# Altium PCB Control_Board_Model_C_Rigid_Flex.PcbDoc (part 7 of 8)
Units mm, origin at the board's own origin, x right, y up, seen from the top; angles counter-clockwise.
Board outline 86.8 x 53.6 mm, 6 copper layers (1-GND, 2-Sig, 3-Pwr, 4-GND, 5-Sig, 6-GND), stack 0.998 mm thick; 418 components, 342 nets, 1601 pads, 45 vias.
Unrouted connection lines stored in the file: 25.
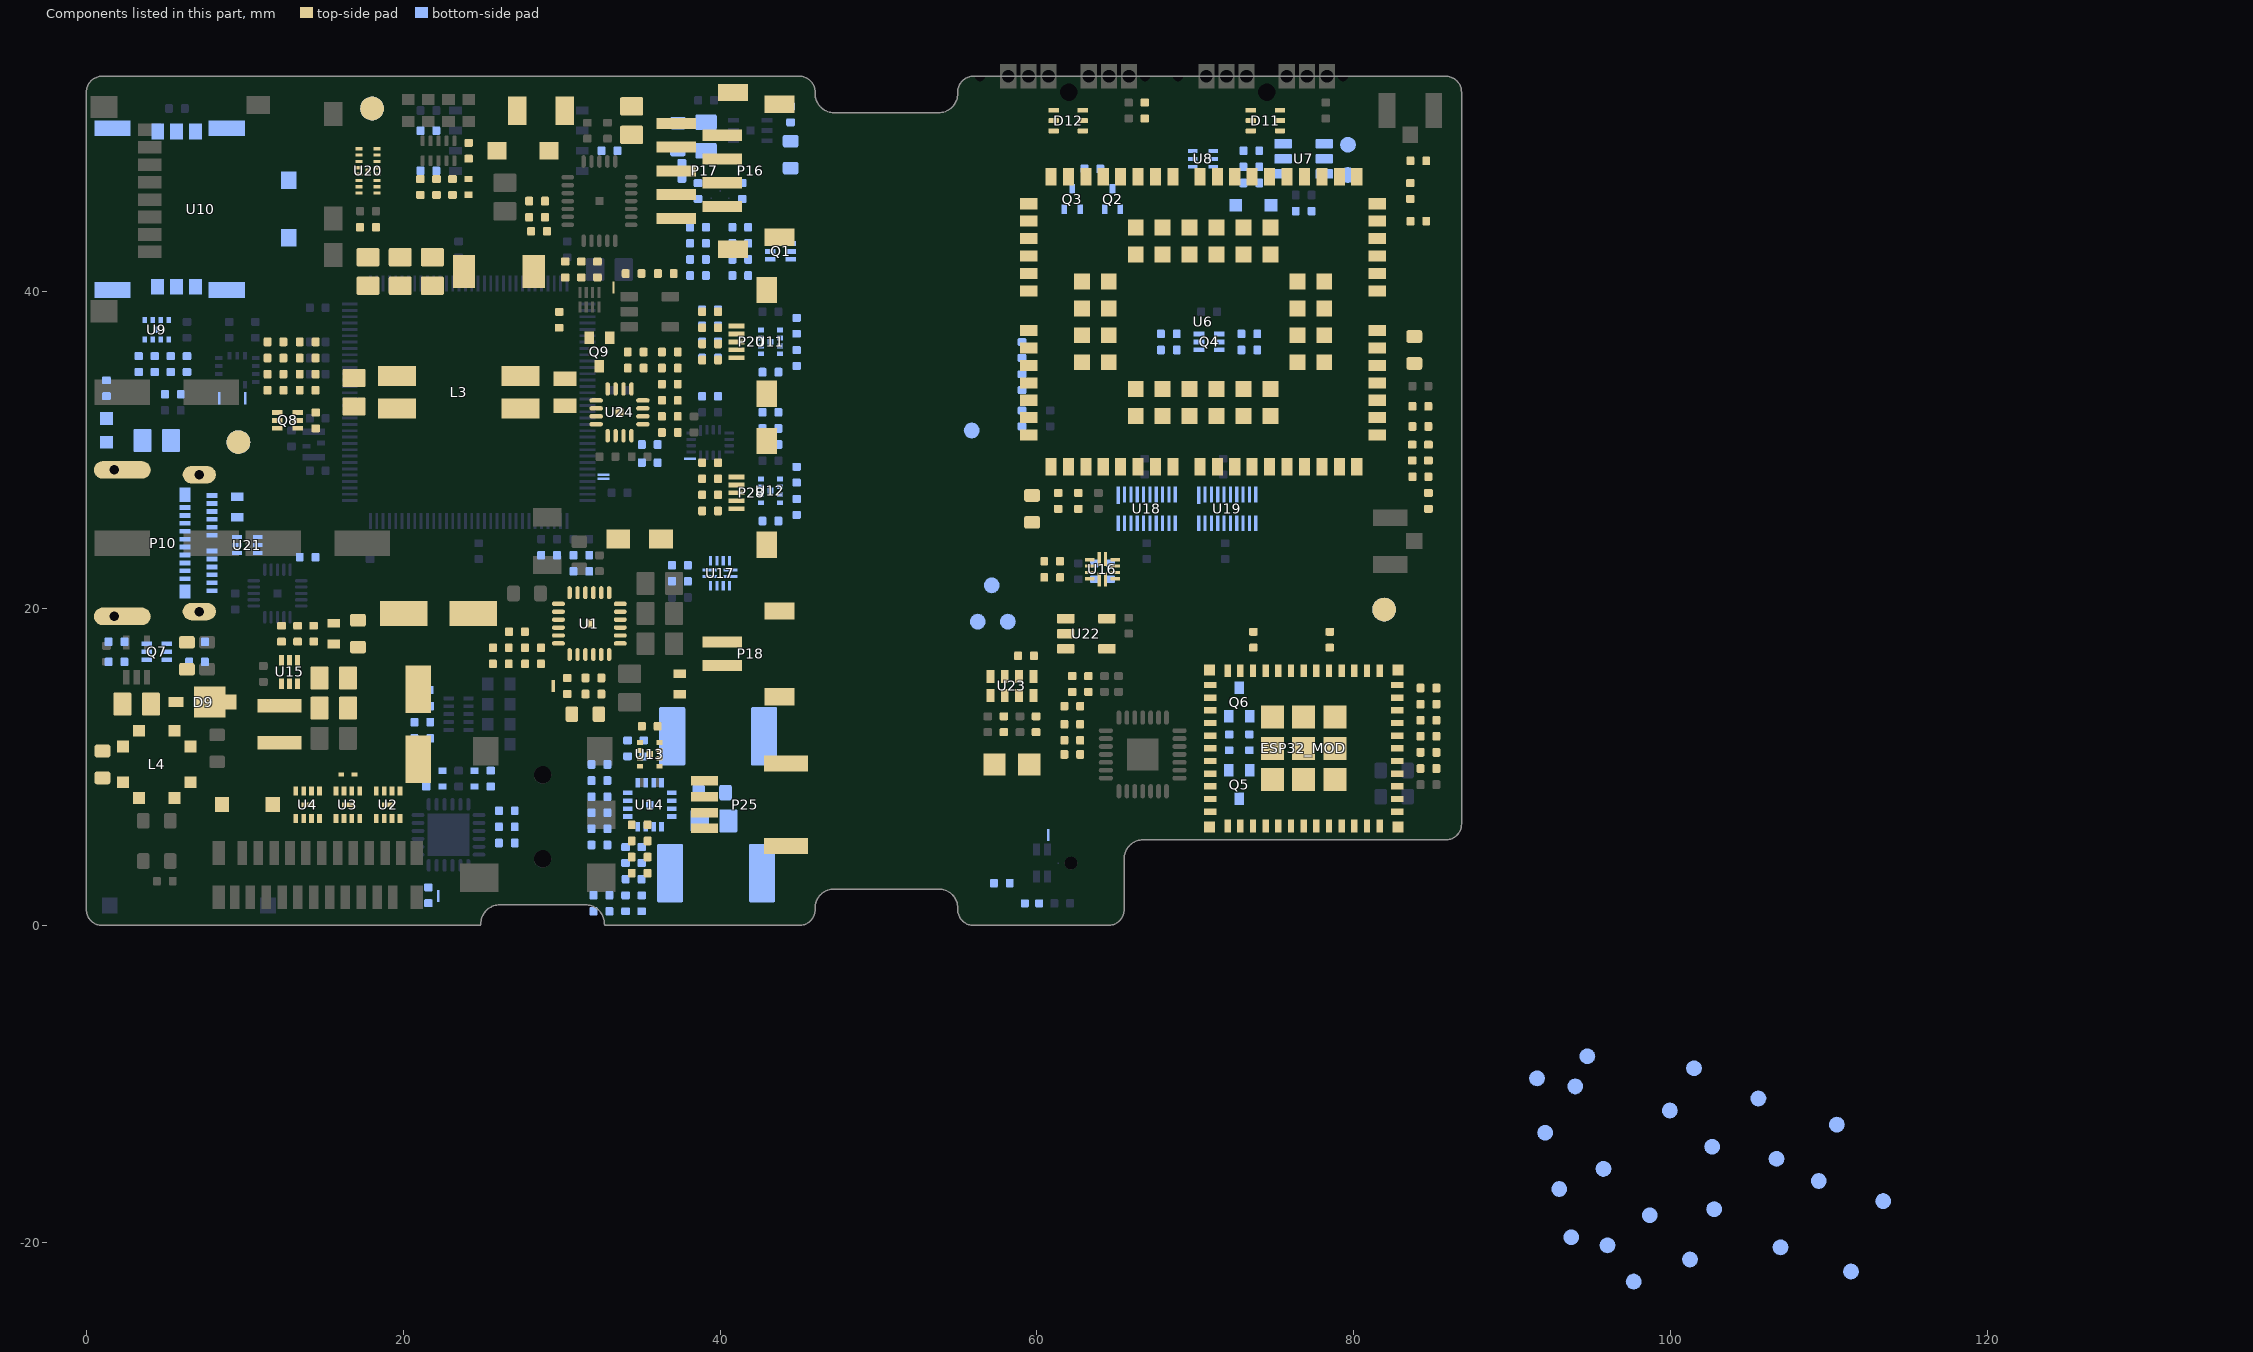
[diagram p7: the components of this part, seen from the top]

## Part data (continued)
U7: library part "TVS DIODE 5.25V 17V SOT23-6", "17V Clamp 5A (8/20µs) Ipp Tvs Diode Surface Mount SOT-23-6", Breakdown Voltage=6V, Capacitance=3.5pF, Case/Package=SOT-23, Clamping Voltage=17V, Leakage Current=150nA, Manufacturer=STMicroelectronics, Max Operating Temperature=125°C, Min Operating Temperature=-40°C, Operating Supply Voltage=1.1V, Package Quantity=3000, Peak Pulse Current=5A, Power Line Protection=Yes, Reverse Standoff Voltage=5.25V, Supplier Part Number 1=497-5235-1-ND, Test Current=1mA, Working Voltage=5V, ComponentLink1Description=http://www.farnell.com/datasheets/1738051.pdf?src-supplier=Element14, ComponentLink1URL=http://www.farnell.com/datasheets/1738051.pdf?src-supplier=Element14, ComponentLink2Description=http://www.st.com/content/ccc/resource/technical/document/datasheet/06/1d/48/9c/6c/20/4a/b2/CD00050750.pdf/files/CD00050750.pdf/jcr:content/translations/en.CD00050750.pdf?src-supplier=Mouser, ComponentLink2URL=http://www.st.com/content/ccc/resource/technical/document/datasheet/06/1d/48/9c/6c/20/4a/b2/CD00050750.pdf/files/CD00050750.pdf/jcr:content/translations/en.CD00050750.pdf?src-supplier=Mouser, ComponentLink3Description=http://www.st.com/web/en/resource/technical/document/datasheet/CD00050750.pdf?src-supplier=Future+Electronics, ComponentLink3URL=http://www.st.com/web/en/resource/technical/document/datasheet/CD00050750.pdf?src-supplier=Future+Electronics, ComponentLink4Description=http://www.st.com/content/ccc/resource/technical/document/datasheet/06/1d/48/9c/6c/20/4a/b2/CD00050750.pdf/files/CD00050750.pdf/jcr:content/translations/en.CD00050750.pdf?src-supplier=Verical, ComponentLink4URL=http://www.st.com/content/ccc/resource/technical/document/datasheet/06/1d/48/9c/6c/20/4a/b2/CD00050750.pdf/files/CD00050750.pdf/jcr:content/translations/en.CD00050750.pdf?src-supplier=Verical, ComponentLink5Description=http://datasheet.iiic.cc/stmicroelectronics/USBLC6-2SC6.pdf?src-supplier=IIIC, ComponentLink5URL=http://datasheet.iiic.cc/stmicroelectronics/USBLC6-2SC6.pdf?src-supplier=IIIC, ComponentLink6Description=http://www.produktinfo.conrad.com/datenblaetter/1100000-1199999/001184109-da-01-en-IC_ESD_PROTECTI_USBLC6_2SC6_SOT_23_6_STM.pdf?src-supplier=Conrad, ComponentLink6URL=http://www.produktinfo.conrad.com/datenblaetter/1100000-1199999/001184109-da-01-en-IC_ESD_PROTECTI_USBLC6_2SC6_SOT_23_6_STM.pdf?src-supplier=Conrad, Contact Plating=Tin,Matte, Data Rate=480Mbps, Depth=1.75mm, Direction=Unidirectional,Bidirectional, Element Configuration=Dual, ESD Protection=Yes, Height=1.3mm, Lead Free="Lead Free", Length=3.05mm, Manufacturer Part Number=USBLC6-2SC6, Max Breakdown Voltage=6V, Max Reverse Leakage Current=150nA, Min Breakdown Voltage=6V, Mount="Surface Mount", Number of Bidirectional Channels=2, Number of Channels=2, Number of Elements=1, Number of Pins=6, Packaging="Tape and Reel", Polarity=Unidirectional,Bidirectional, Pricing 1="1=0.47, 10=0.399, 25=0.3728, 100=0.2769, 250=0.263, 500=0.2162, 1000=0.1757 (USD)", Radiation Hardening=No, REACH SVHC="No SVHC", Reverse Breakdown Voltage=6V, Stock 1=49245, Supplier 1=Digi-Key, Termination=SMD/SMT, Width=1.75mm
U8 U21: library part "CMC 200MA 2LN SMD ESD", "2 Line Common Mode Choke Surface Mount  200mA DCR 2.5Ohm", Case/Package=QFN, Current=200mA, DC Resistance (DCR)=2.5R, Manufacturer=STMicroelectronics, Max Operating Temperature=85°C, Min Operating Temperature=-40°C, Package Quantity=1, Supplier Part Number 1=497-10773-1-ND, ComponentLink1Description=http://www.st.com/web/en/resource/technical/document/datasheet/CD00282307.pdf?src-supplier=Future+Electronics, ComponentLink1URL=http://www.st.com/web/en/resource/technical/document/datasheet/CD00282307.pdf?src-supplier=Future+Electronics, ComponentLink2Description=http://www.st.com/content/ccc/resource/technical/document/datasheet/3a/28/cf/d0/31/63/48/8c/CD00282307.pdf/files/CD00282307.pdf/jcr:content/translations/en.CD00282307.pdf?src-supplier=Digi-Key, ComponentLink2URL=http://www.st.com/content/ccc/resource/technical/document/datasheet/3a/28/cf/d0/31/63/48/8c/CD00282307.pdf/files/CD00282307.pdf/jcr:content/translations/en.CD00282307.pdf?src-supplier=Digi-Key, ComponentLink3Description=http://www.mouser.com/ds/2/389/ecmf02-2amx6-954491.pdf?src-supplier=Mouser, ComponentLink3URL=http://www.mouser.com/ds/2/389/ecmf02-2amx6-954491.pdf?src-supplier=Mouser, ComponentLink4Description=https://www.verical.com/server-webapp/html/getDatasheet?partID=259862&src-supplier=Verical, ComponentLink4URL=https://www.verical.com/server-webapp/html/getDatasheet?partID=259862&src-supplier=Verical, Current Rating=200mA, Depth=1.55mm, Height=0.022inch, Lead Free="Lead Free", Length=1.75mm, Manufacturer Part Number=ECMF02-2AMX6, Max Current Rating=200mA, Mount="Surface Mount", Number of Lines=2, Number of Pins=6, Packaging="Tape and Reel", Pricing 1="1=0.48, 10=0.418, 25=0.3888, 50=0.3288, 100=0.2989, 250=0.281, 500=0.2511, 1000=0.2033 (USD)", Radiation Hardening=No, REACH SVHC="No SVHC", Stock 1=23653, Supplier 1=Digi-Key, Termination=Flat, Width=0.059inch
U9 U11 U12 U13: library part "FILTER RC(PI) ESD SMD  8-UFDFN EP", "RC (Pi) EMI Filter 2nd Order Low Pass 3 Channel R = 47Ohms, 100Ohms, C = 20pF  8-UFDFN Exposed Pad", Capacitance=20pF, Case/Package=SMD/SMT, Clamping Voltage=10V, Frequency=308MHz, Manufacturer="Texas Instruments", Max Operating Temperature=85°C, Min Operating Temperature=-40°C, Operating Supply Voltage=5.5V, Package Quantity=1, Supplier Part Number 1=296-28299-1-ND, ComponentLink1Description=http://www.ti.com/lit/ds/symlink/tpd3f303.pdf?src-supplier=Digi-Key, ComponentLink1URL=http://www.ti.com/lit/ds/symlink/tpd3f303.pdf?src-supplier=Digi-Key, ComponentLink2Description=http://focus.ti.com/lit/ds/symlink/tpd3f303.pdf?src-supplier=Avnet+Europe, ComponentLink2URL=http://focus.ti.com/lit/ds/symlink/tpd3f303.pdf?src-supplier=Avnet+Europe, ComponentLink3Description=https://www.verical.com/server-webapp/html/getDatasheet?partID=302817&src-supplier=Verical, ComponentLink3URL=https://www.verical.com/server-webapp/html/getDatasheet?partID=302817&src-supplier=Verical, ComponentLink4Description=http://www.farnell.com/datasheets/1558442.pdf?src-supplier=Element14, ComponentLink4URL=http://www.farnell.com/datasheets/1558442.pdf?src-supplier=Element14, Contact Plating=Gold, Depth=1.7mm, ESD Protection=Yes, Height=0.026inch, Lead Free="Lead Free", Length=2.2mm, Manufacturer Part Number=TPD3F303DPVR, Mount="Surface Mount", Number of Channels=3, Number of Pins=8, Packaging="Tape and Reel", Pricing 1="1=0.85, 10=0.812, 25=0.7856, 50=0.6414, 100=0.576, 250=0.5236, 500=0.4974, 1000=0.4451 (USD)", Radiation Hardening=No, REACH SVHC="No SVHC", Stock 1=4896, Supplier 1=Digi-Key, Termination=Flat, Width=0.063inch
U10: library part "NANOSIM SOCKET 1.11H P/PULL TYPE", "6 Position Card Connector NANO SIM Surface Mount, Right Angle Gold", Manufacturer=Molex, Supplier Part Number 1=WM23749CT-ND, ComponentLink1Description=https://www.molex.com/pdm_docs/sd/1042240820_sd.pdf?src-supplier=Digi-Key, ComponentLink1URL=https://www.molex.com/pdm_docs/sd/1042240820_sd.pdf?src-supplier=Digi-Key, ComponentLink2Description=http://www.molex.com/pdm_docs/sd/1042240820_sd.pdf?src-supplier=Avnet, ComponentLink2URL=http://www.molex.com/pdm_docs/sd/1042240820_sd.pdf?src-supplier=Avnet, Connector Type=Connector, Contact Plating=Gold, Manufacturer Part Number=1042240820, Mount="Surface Mount", Number of Positions=6, Number of Rows=2, Orientation="Right Angle", Packaging="Tape and Reel", Pitch=2.54mm, Pricing 1="1=1.31, 10=1.152, 25=1.0844, 50=1.039, 100=0.9939, 250=0.9036, 500=0.8132, 1000=0.7228 (USD)", Stock 1=10989, Supplier 1=Digi-Key
U14: library part "IC STSPIN220 MOTOR DRVR BIPOLAR 0-5V 16FPN", "Bipolar Motor Driver Power MOSFET Step/Direction 16-VFQFPN (3x3)", Manufacturer=STMicroelectronics, Max Operating Temperature=150°C, Min Operating Temperature=-40°C, Output Current=1.3A, Supplier Part Number 1=497-16602-1-ND, ComponentLink1Description=http://www.st.com/content/ccc/resource/technical/document/datasheet/group3/42/7e/5c/90/70/ef/47/95/DM00291865/files/DM00291865.pdf/jcr:content/translations/en.DM00291865.pdf?src-supplier=Digi-Key, ComponentLink1URL=http://www.st.com/content/ccc/resource/technical/document/datasheet/group3/42/7e/5c/90/70/ef/47/95/DM00291865/files/DM00291865.pdf/jcr:content/translations/en.DM00291865.pdf?src-supplier=Digi-Key, ComponentLink2Description=http://www.farnell.com/datasheets/2815804.pdf?src-supplier=Newark, ComponentLink2URL=http://www.farnell.com/datasheets/2815804.pdf?src-supplier=Newark, ComponentLink3Description=http://www.farnell.com/datasheets/2815804.pdf?src-supplier=Farnell, ComponentLink3URL=http://www.farnell.com/datasheets/2815804.pdf?src-supplier=Farnell, Logic Function=AND, Manufacturer Part Number=STSPIN220, Mount="Surface Mount", Packaging="Cut Tape", Pricing 1="1=1.62, 10=1.458, 25=1.3752, 100=1.1, 250=0.9625, 500=0.935, 1000=0.7425 (USD)", Stock 1=3586, Supplier 1=Digi-Key
U15: library part "IC TPS61023DRLT REG BOOST ADJ 3A SOT563", "Boost Switching Regulator IC Positive Adjustable 2.2V 1 Output 3A SOT-563, SOT-666", Input Voltage="0.5 V to 5.5 V", Input Voltage MAX="5.5 V", Input Voltage MIN="0.5 V", Manufacturer="Texas Instruments", Maximum Operating Temperature="+ 125 C", Minimum Operating Temperature="- 40 C", Output Current="3.7 A", Output Voltage="2.2 V to 5.5 V", Package / Case=SOT-5X3-6, Quiescent Current="0.9 uA", Supplier Part Number 1=595-TPS61023DRLT, Switching Frequency="1 MHz", Brand="Texas Instruments", Category="Switching Voltage Regulators", Development Kit=TPS61023EVM-052, Height="0.55 mm", Length="1.6 mm", Manufacturer Part Number=TPS61023DRLT, Minimum Order Quantity=1, Mount="Surface Mount", Mounting Style=SMD/SMT, Number of Outputs="1 Output", Packaging="Cut Tape", Pricing 1="1=1.07, 10=0.902, 100=0.693, 250=0.612, 500=0.580, 1000=0.451, 2500=0.429, 5000=0.413, 10000=0.400 (USD)", Product Status="New Product", Product Type="Switching Voltage Regulators", Reeling=True, RoHS="RoHS Compliant", RoHS - Mouser=Y, Series=TPS61023, Shutdown=Shutdown, Standard Pack Qty=250, Stock 1=196, Subcategory="PMIC - Power Management ICs", Supplier 1=Mouser, Supplier 2=Digi-Key, Supplier Part Number 2=296-TPS61023DRLTCT-ND, Supply Voltage - Min="0.5 V", Topology=Boost, Width="1.2 mm"
U16 U17: library part "IC TS3USB3031 USB SWITCH DUAL 1X2 12WQFN", "USB Switch IC 1 Channel 12-WQFN (1.8x1.8)", Manufacturer="Texas Instruments", Maximum Operating Temperature="+ 85 C", Minimum Operating Temperature="- 40 C", On Resistance - Max="7 Ohms", Operating Supply Current="40 uA", Operating Supply Voltage="2.5 V", Package / Case=WQFN-12, Supplier Part Number 1=595-TS3USB3031RMGR, Supply Voltage - Max="4.3 V", Switch Continuous Current="60 mA", Bandwidth="6.5 GHz", Brand="Texas Instruments", Category="USB Switch ICs", ComponentLink1Description="Data sheet", ComponentLink1URL=https://www.ti.com/lit/gpn/ts3usb3031, Configuration="1 x DP3T", Development Kit=TS3USB3031EVM, Manufacturer Part Number=TS3USB3031RMGR, Minimum Order Quantity=1, Mount="Surface Mount", Mounting Style=SMD/SMT, Number of Switches="2 Switch", Off Time - Max="0.1 ns", On Time - Max="100 us", Packaging="Cut Tape", Pricing 1="1=1.16, 10=0.980, 100=0.753, 250=0.666, 500=0.630, 1000=0.490, 3000=0.466, 6000=0.448, 9000=0.434 (USD)", Product="USB 2.0, MHL, MyDP Switches", Product Type="USB Switch ICs", Reeling=True, RoHS="RoHS Compliant", RoHS - Mouser=Y, Series=TS3USB3031, Standard Pack Qty=3000, Stock 1=14547, Subcategory="Switch ICs", Supplier 1=Mouser, Supplier 2=Digi-Key, Supplier Part Number 2=296-41018-1-ND, Supply Voltage - Min="2.5 V"
U18 U19: library part "IC TXB0108 TRNSLTR BIDIRECTIONAL 20USON", "Voltage Level Translator Bidirectional 1 Circuit 8 Channel 100Mbps 20-USON (4x2)", High Level Output Current=-20uA, Low Level Output Current=20uA, Manufacturer="Texas Instruments", Max Operating Temperature=85°C, Max Supply Voltage=5.5V, Min Operating Temperature=-40°C, Min Supply Voltage=1.2V, Package Quantity=1, Quiescent Current=3.5uA, Supplier Part Number 1=296-27217-1-ND, ComponentLink1Description=http://www.ti.com/general/docs/lit/getliterature.tsp?genericPartNumber=TXB0108&amp;&amp;fileType=pdf&src-supplier=Element14, ComponentLink1URL=http://www.ti.com/general/docs/lit/getliterature.tsp?genericPartNumber=TXB0108&amp;&amp;fileType=pdf&src-supplier=Element14, ComponentLink2Description=http://www.ti.com/general/docs/suppproductinfo.tsp?distId=10&gotoUrl=http%3A%2F%2Fwww.ti.com%2Flit%2Fgpn%2Ftxb0108&src-supplier=Digi-Key, ComponentLink2URL=http://www.ti.com/general/docs/suppproductinfo.tsp?distId=10&gotoUrl=http%3A%2F%2Fwww.ti.com%2Flit%2Fgpn%2Ftxb0108&src-supplier=Digi-Key, ComponentLink3Description=http://www.ti.com/lit/ds/symlink/txb0108.pdf?src-supplier=Avnet+Europe, ComponentLink3URL=http://www.ti.com/lit/ds/symlink/txb0108.pdf?src-supplier=Avnet+Europe, ComponentLink4Description=http://www.ti.com/general/docs/lit/getliterature.tsp?genericPartNumber=TXB0108&&fileType=pdf&src-supplier=Avnet, ComponentLink4URL=http://www.ti.com/general/docs/lit/getliterature.tsp?genericPartNumber=TXB0108&&fileType=pdf&src-supplier=Avnet, Data Rate=100Mbps, Lead Free="Lead Free", Logic Function=Translator, Manufacturer Part Number=TXB0108DQSR, Mount="Surface Mount", Number of Bits=8, Number of Channels=8, Number of Inputs=8, Number of Pins=20, Packaging="Tape and Reel", Pricing 1="1=1.29, 10=1.151, 25=1.092, 100=0.897, 250=0.8385, 500=0.741, 1000=0.585 (USD)", Propagation Delay=4ns, Radiation Hardening=No, REACH SVHC="No SVHC", Stock 1=18752, Supplier 1=Digi-Key, Turn-On Delay Time=35.6ns
U20: library part "FILTER RC(PI) 45 OHM/20PF SMD", "RC (Pi) EMI Filter 2nd Order Low Pass 6 Channel R = 45Ohms, C = 20pF (Total)  16-UFDFN Exposed Pad", Breakdown Voltage=8V, Capacitance=20pF, Case/Package=QFN, Manufacturer=STMicroelectronics, Max Operating Temperature=85°C, Min Operating Temperature=-30°C, Package Quantity=1, Supplier Part Number 1=497-8751-1-ND, ComponentLink1Description=http://www.st.com/content/ccc/resource/technical/document/datasheet/a7/86/d3/98/2c/7f/4b/d2/CD00217829.pdf/files/CD00217829.pdf/jcr:content/translations/en.CD00217829.pdf?src-supplier=Digi-Key, ComponentLink1URL=http://www.st.com/content/ccc/resource/technical/document/datasheet/a7/86/d3/98/2c/7f/4b/d2/CD00217829.pdf/files/CD00217829.pdf/jcr:content/translations/en.CD00217829.pdf?src-supplier=Digi-Key, ComponentLink2Description=https://www.verical.com/server-webapp/html/getDatasheet?partID=558558&src-supplier=Verical, ComponentLink2URL=https://www.verical.com/server-webapp/html/getDatasheet?partID=558558&src-supplier=Verical, ComponentLink3Description=http://www.st.com/web/en/resource/technical/document/datasheet/CD00217829.pdf?src-supplier=Mouser, ComponentLink3URL=http://www.st.com/web/en/resource/technical/document/datasheet/CD00217829.pdf?src-supplier=Mouser, Contact Plating=Gold, Depth=1.25mm, ESD Protection=Yes, Height=0.022inch, Lead Free="Lead Free", Length=3.55mm, Manufacturer Part Number=EMIF06-MSD02N16, Max Breakdown Voltage=8V, Mount="Surface Mount", Number of Channels=6, Number of Pins=16, Packaging="Tape and Reel", Pricing 1="1=0.95, 10=0.904, 25=0.8752, 50=0.7148, 100=0.6418, 250=0.5834, 500=0.5543, 1000=0.4959 (USD)", Radiation Hardening=No, REACH SVHC="No SVHC", Stock 1=3881, Supplier 1=Digi-Key, Termination=Flat, Width=0.047inch
U22: library part "IC 24LC00T-I/OT EEPROM 128 I2C SOT23-5", "EEPROM Memory IC 128b (16 x 8) I²C 400kHz 3500ns SOT-23-5", Case/Package=SOT-23, Frequency=400kHz, Manufacturer=Microchip, Max Operating Temperature=85°C, Max Supply Voltage=5.5V, Min Operating Temperature=-40°C, Min Supply Voltage=2.5V, Nominal Supply Current=2mA, Package Quantity=3000, Supplier Part Number 1=24LC00T-I/OTCT-ND, Access Time=900ns, ComponentLink1Description=http://www.farnell.com/datasheets/1669367.pdf?src-supplier=Element14, ComponentLink1URL=http://www.farnell.com/datasheets/1669367.pdf?src-supplier=Element14, ComponentLink2Description=http://ww1.microchip.com/downloads/en/DeviceDoc/21178H.pdf?src-supplier=Avnet+Europe, ComponentLink2URL=http://ww1.microchip.com/downloads/en/DeviceDoc/21178H.pdf?src-supplier=Avnet+Europe, ComponentLink3Description=http://www.microchip.com/mymicrochip/filehandler.aspx?ddocname=en011773&src-supplier=Future+Electronics, ComponentLink3URL=http://www.microchip.com/mymicrochip/filehandler.aspx?ddocname=en011773&src-supplier=Future+Electronics, ComponentLink4Description=https://www.distrelec.biz/Web/Downloads/_t/ds/24AA00_24LC00_24C00_eng_tds.pdf?mime=application%2Fpdf&src-supplier=Distrelec, ComponentLink4URL=https://www.distrelec.biz/Web/Downloads/_t/ds/24AA00_24LC00_24C00_eng_tds.pdf?mime=application%2Fpdf&src-supplier=Distrelec, ComponentLink5Description=https://www.verical.com/server-webapp/html/getDatasheet?partID=790518&src-supplier=Verical, ComponentLink5URL=https://www.verical.com/server-webapp/html/getDatasheet?partID=790518&src-supplier=Verical, ComponentLink6Description=http://www.produktinfo.conrad.com/datenblaetter/1000000-1099999/001085284-da-01-en-IC_EEPROM_128B_24LC00T_I_OT_SOT_23_5_MCP.pdf?src-supplier=Conrad, ComponentLink6URL=http://www.produktinfo.conrad.com/datenblaetter/1000000-1099999/001085284-da-01-en-IC_EEPROM_128B_24LC00T_I_OT_SOT_23_5_MCP.pdf?src-supplier=Conrad, Contact Plating=Tin,Matte, Density=128b, Height=1.3mm, Interface=I2C,2-Wire,Serial, Lead Free="Lead Free", Length=3.1mm, Manufacturer Part Number=24LC00T-I/OT, Max Frequency=400kHz, Memory Size=128b, Memory Type=EEPROM, Mount="Surface Mount", Number of Pins=5, Packaging="Tape and Reel", Pricing 1="1=0.19, 100=0.1785 (USD)", Radiation Hardening=No, REACH SVHC="No SVHC", Stock 1=29747, Supplier 1=Digi-Key, Width=1.8mm
U23: library part "IC RV-3028 RTC CLK/CALENDAR I2C 8-SMT", "2-Bit Bidirectional Voltage-Level Translator for Open-Drain Application", Manufacturer="Micro Crystal", Supplier Part Number 1=2195-RV-3028-C732.768KHZ1PPM-TA-QCCT-ND, Manufacturer Part Number="RV-3028-C7 32.768KHZ 1PPM-TA-QC", Mount="Surface Mount", Pricing 1="1=2.71, 10=2.435, 25=2.3016, 100=1.9949, 250=1.8926, 500=1.6982 (USD)", Stock 1=4121, Supplier 1=Digi-Key
U24: library part "IC TPS55340RTET REG BOOST ADJ 5.25A 16WQFN", "Boost Switching Regulator IC Positive, Isolation Capable Adjustable 2.9V 1 Output 5.25A (Switch) 16-WFQFN Exposed Pad", Manufacturer="Texas Instruments", Max Input Voltage=32V, Max Operating Temperature=150°C, Max Output Current=5A, Max Output Voltage=38V, Min Input Voltage=2.9V, Min Operating Temperature=-40°C, Package Quantity=1, Quiescent Current=500uA, Supplier Part Number 1=296-30530-1-ND, Switching Frequency=1.14MHz, ComponentLink1Description=http://www.ti.com/general/docs/lit/getliterature.tsp?genericPartNumber=TPS55340&amp;&amp;fileType=pdf&src-supplier=Newark, ComponentLink1URL=http://www.ti.com/general/docs/lit/getliterature.tsp?genericPartNumber=TPS55340&amp;&amp;fileType=pdf&src-supplier=Newark, ComponentLink2Description=http://www.ti.com/general/docs/lit/getliterature.tsp?genericPartNumber=TPS55340&&fileType=pdf&src-supplier=Avnet, ComponentLink2URL=http://www.ti.com/general/docs/lit/getliterature.tsp?genericPartNumber=TPS55340&&fileType=pdf&src-supplier=Avnet, ComponentLink3Description=http://www.farnell.com/datasheets/2019229.pdf?src-supplier=Element14, ComponentLink3URL=http://www.farnell.com/datasheets/2019229.pdf?src-supplier=Element14, ComponentLink4Description=http://www.ti.com/lit/ds/symlink/tps55340.pdf?src-supplier=Avnet+Europe, ComponentLink4URL=http://www.ti.com/lit/ds/symlink/tps55340.pdf?src-supplier=Avnet+Europe, Height=0.72mm, Lead Free="Lead Free", Length=3.15mm, Manufacturer Part Number=TPS55340RTET, Min Output Voltage=2.9V, Mount="Surface Mount", Number of Outputs=1, Number of Pins=16, Output Current=5A, Output Type=Adjustable, Output Voltage=38V, Packaging="Tape and Reel", Pricing 1="1=3.76, 10=3.372, 25=3.1884, 100=2.6215 (USD)", Radiation Hardening=No, REACH SVHC="No SVHC", Stock 1=6832, Supplier 1=Digi-Key, Synchronous Rectifier=No, Topology=Boost,Flyback,SEPIC, Width=3.15mm

## Text inside footprints (layer, text, board x,y; h text height)
C9: Top Overlay "+" at 8.128,26.416 h1.02; TOP ASSY "+" at 7.239,23.622 h1.02
C10: Top Overlay "+" at 12.065,21.209 h1.02 r180; TOP ASSY "+" at 12.446,24.638 h1.02 r180
C11: Top Overlay "+" at 8.128,35.941 h1.02; TOP ASSY "+" at 7.239,33.147 h1.02
C25: Top Overlay "+" at 19.177,15.367 h1.02 r90; TOP ASSY "+" at 21.336,14.986 h1.02 r180
C26: Top Overlay "+" at 19.304,22.733 h1.02 r180; TOP ASSY "+" at 20.701,20.193 h1.02 r180
C70: Top Overlay "+" at 56.515,11.684 h1.02 r180; TOP ASSY "+" at 55.88,10.668 h1.02 r180
Ground&PowerPlanes_1: 1-GND "1" at 120.972,2.394 h2
Ground&PowerPlanes_4: 2-Sig "4" at 127.54,2.394 h2
Ground&PowerPlanes_5: 3-Pwr "5" at 129.794,2.328 h2
Ground&PowerPlanes_6: 6-GND "6" at 132.112,2.394 h2
L3: TOP ASSY "1" at 27.305,32.766 h0.5 r270; TOP ASSY "2" at 27.305,34.798 h0.5 r270; TOP ASSY "3" at 19.431,34.925 h0.5 r270; TOP ASSY "4" at 19.431,32.766 h0.5 r270
Logo: Bottom Overlay "CPU" at 79.685,31.242 h2.5 r270; Bottom Overlay "Acme" at 83.285,26.242 h2.5 r270
P10: BOT ASSY "A1" at 8.53,20.61 h0.5 r270; BOT ASSY "A12" at 8.52,26.82 h0.5 r270; BOT ASSY "B12" at 5.1,20.15 h0.5 r270; BOT ASSY "B1" at 5.06,27.24 h0.5 r270
P20: TOP ASSY "5" at 42.245,37.73 h0.5 r90; TOP ASSY "1" at 42.245,35.73 h0.5 r90
P28: TOP ASSY "5" at 42.245,28.205 h0.5 r90; TOP ASSY "1" at 42.245,26.205 h0.5 r90
U10: BOT ASSY "S6" at 6.604,41.275 h0.5 r90; BOT ASSY "S5" at 5.461,41.275 h0.5 r90; BOT ASSY "S4" at 6.604,49.911 h0.5 r90; BOT ASSY "S3" at 4.191,41.275 h0.5 r90; BOT ASSY "S2" at 5.461,49.911 h0.5 r90; BOT ASSY "S1" at 4.191,50.038 h0.5 r90
X5: TOP ASSY "8" at 2.921,49.784 h1 r90; TOP ASSY "1" at 2.855,42.312 h1 r90
Y1: BOT ASSY "+" at 3.147,2.611 h1.27; Bottom Overlay "+" at 1.877,-0.945 h1.27